# Altium PCB 5APOWER.PcbDoc
Units mil, origin at the board's own origin, x right, y up, seen from the top; angles counter-clockwise.
Board outline 3279.39 x 1075.3 mil, 2 copper layers (Top Layer, Bottom Layer); 46 components, 19 nets, 119 pads, 97 vias.
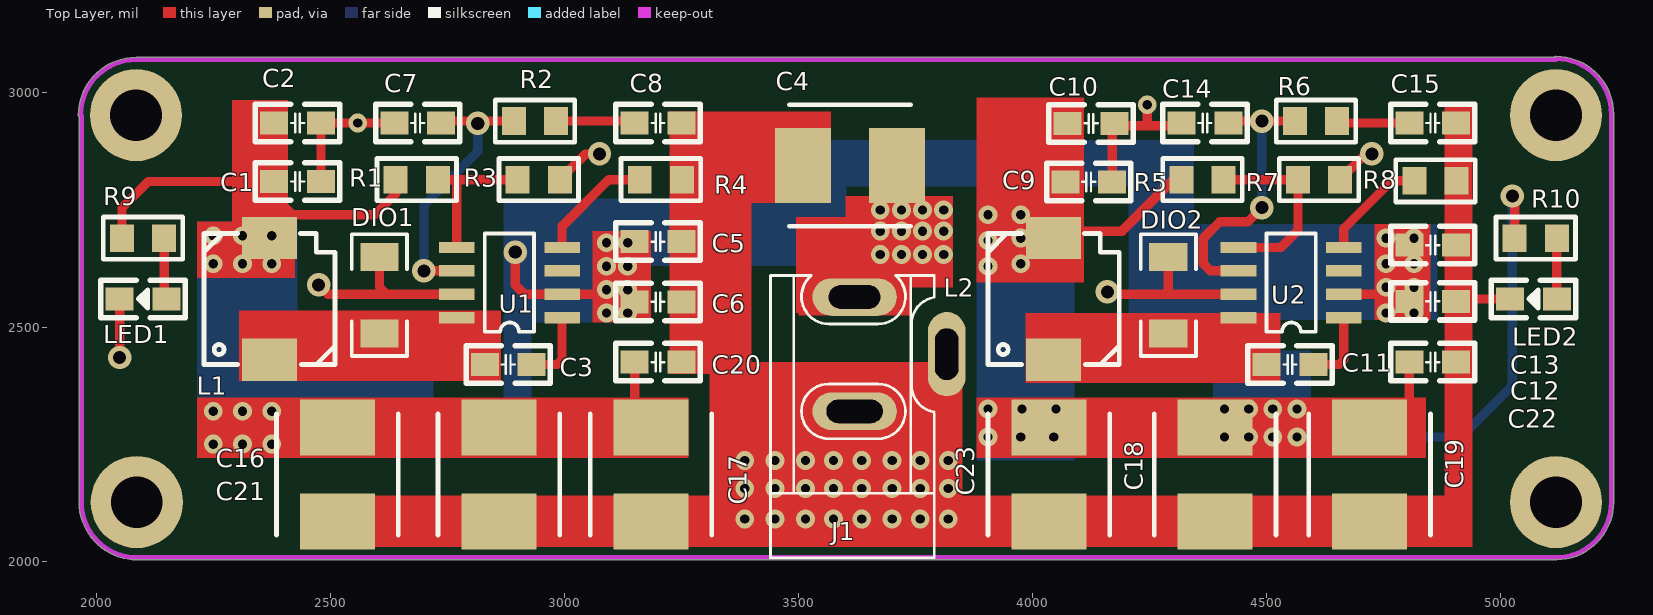
[diagram p0: Top Layer view]
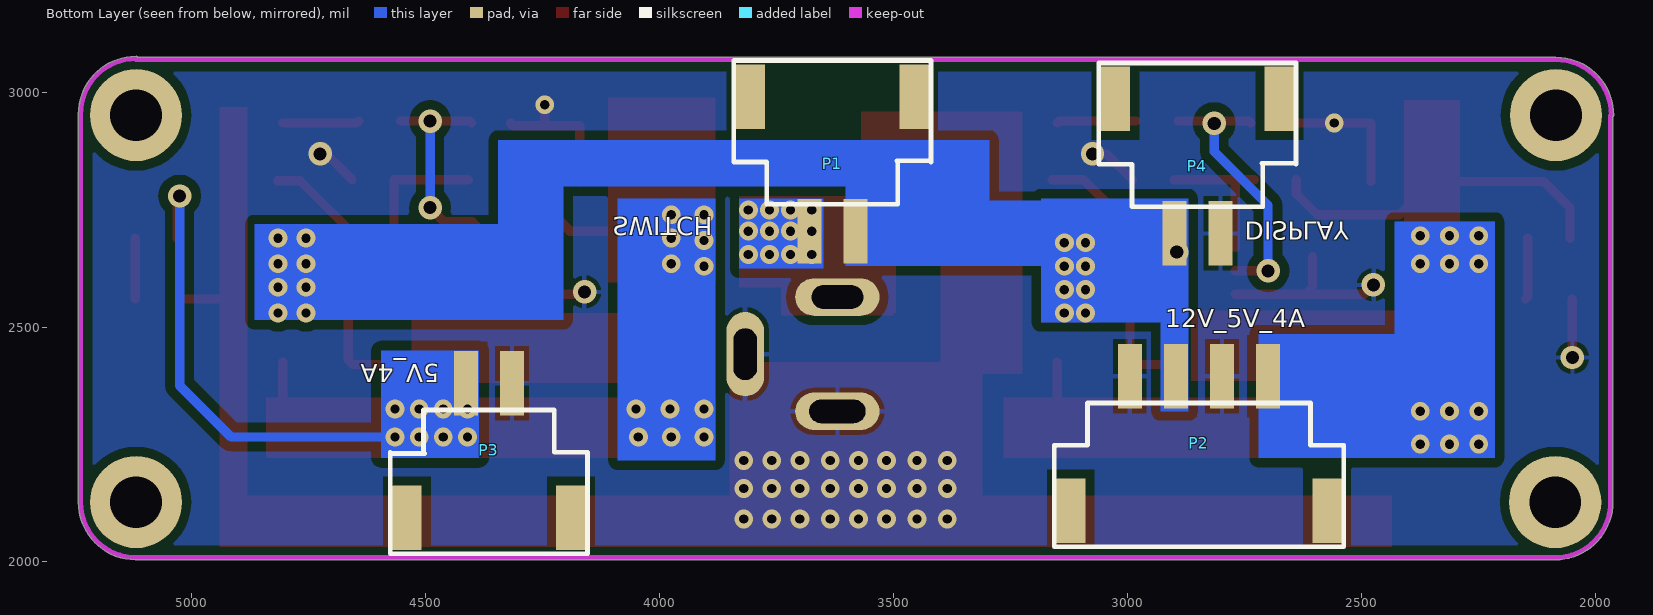
[diagram p1: Bottom Layer view, seen from below]

## Layer stack, top to bottom
Top Solder: solder mask 0.4, Solder Resist, Dk 3.5
Top Layer: signal copper 1.4
Dielectric 1: dielectric 12.6, FR-4, Dk 4.8
Bottom Layer: signal copper 1.4
Bottom Solder: solder mask 0.4, Solder Resist, Dk 3.5

## Board outline
1963.47,2125.98 cw(c1968.49,2125.98) 1963.49,2126.37 1963.49,2949.04 cw(c1966.87,2952.74) 1961.86,2952.74 cw(c2085,2952.74) 2085,3075.88 5113.92,3075.88 cw(c5118.11,3073.13) 5118.11,3078.14 cw(c5118.11,2955) 5241.25,2955 5241.25,2125.98 cw(c5118.11,2125.98) 5120.08,2002.86 cw(c5118.11,2125.98) 5118.11,2002.84 cw(c5118.11,2007.86) 5117.72,2002.86 2087,2002.86 cw(c2086.61,2007.86) 2086.61,2002.84 cw(c2086.61,2125.98)

## Design rules (kind name [scope] priority, off if disabled: settings)
Clearance [All] p1: gap=10
PolygonConnect [All] p1: connectstyle=Relief reliefconductorwidth=10 reliefentries=4 polygonreliefangle="90 Angle" airgapwidth=10
RoutingVias [All] p1: holewidth=28 width=50 viastyle="Through Hole" minholewidth=28 minwidth=50 maxholewidth=28 maxwidth=50
SolderMaskExpansion [All] p1: expansion=4
Width [All] p1: maxlimit=40 minlimit=10 preferedwidth=10
30 further rules are at their usual default settings.

## Components (designator, comment, footprint, x,y, rotation, side; value= is the part's Value field where it differs from the comment)
C1 "10uf" 0805C 2480,2811 r180 top
C2 "0.1uF" 0805C 2480,2936 r180 top
C3 "0.1uF" 0805C 2830,2420 r0 top
C4 "100uf" S-C6.6-H7.2 3740,2715 r180 top
C5 "4.7uF" 0805C 3250,2682.5 r180 top
C6 "4.7uF" 0805C 3250,2553.75 r180 top
C7 "47pF" 0805C 2636.67,2936 r0 top
C8 "4700pF" 0805C 3250,2936 r180 top
C9 "10uF" 0805C 4170,2810 r180 top
C10 "0.1uF" 0805C 4175,2935 r180 top
C11 "0.1uF" 0805C 4500,2420 r0 top
C12 "4.7uF" 0805C 4905,2555 r180 top
C13 "4.7uF" 0805C 4905,2675 r180 top
C14 "47pF" 0805C 4318.33,2936 r0 top
C15 "4700pF" 0805C 4905,2936 r180 top
C16 "220uF/16V" S-C6.6-H7.2 2645,2315 r270 top
C17 "220uF/16V" S-C6.6-H7.2 3315,2315 r270 top
C18 "220uF/16V" S-C6.6-H7.2 4520,2315 r270 top
C19 "220uF/16V" S-C6.6-H7.2 4850,2315 r270 top
C20 "10uF" 0805C 3250,2425 r180 top
C21 "220uF/16V" S-C6.6-H7.2 2990,2315 r270 top
C22 "10uF" 0805C 4905,2425 r180 top
C23 "220uF/16V" S-C6.6-H7.2 4165,2315 r270 top
DIO1 "SS54" SMB-B 2605,2650 r270 top
DIO2 "SS54" SMB-B 4290,2650 r270 top
J1 "PWR2.5" DC10B 3790,2145 r90 top
L1 "10uH/5A" L-7X7S 2370,2560 r0 top
L2 "10uH/5A" L-7X7S 4045,2560 r0 top
LED1 "RED_LED" 0805D 2100,2560 r180 top
LED2 "RED_LED" 0805D 5070,2560 r180 top
P1 "SWITCH" 2.54-2P 3680,2705 r180 bottom
P2 "12V_5V_4A" 2.54-4p 2700,2395 r0 bottom
P3 "5V_4A" 2.54-2P 4315,2380 r0 bottom
P4 "DISPLAY" 2.54-2P 2900,2700 r180 bottom
R1 "53.6K/%1" 0805_RES 2639.67,2815 r0 top
R2 "16.9K" 0805_RES 2892.33,2940 r0 top
R3 "10.2K/%1" 0805_RES 2900.33,2815 r0 top
R4 "243K" 0805_RES 3161,2815 r0 top
R5 "53.6K/%1" 0805_RES 4318,2815 r0 top
R6 "16.9K" 0805_RES 4560.67,2940 r0 top
R7 "10.2K/%1" 0805_RES 4567,2815 r0 top
R8 "243K" 0805_RES 4816,2812.25 r0 top
R9 "4.7K" 0805_RES 2055,2690 r0 top
R10 "4.7K" 0805_RES 5030,2690 r0 top
U1 "TPS54560DDA" SO08 2995,2520 r180 top
U2 "TPS54560DDA" SO08 4665,2520 r180 top

## Footprints (in the part's own frame and the unit in brackets; to place one, negate y for a bottom-side part, rotate by r counter-clockwise, add the part's x,y. Pads: shape width x height; smd on the part's side, far side on the other; paste and mask are expansions set on the pad)
2.54-2P [mm]
  rect 1.6x3.5 smd: 0(-3.2,7.3) 0(5.7,7.3)
  rect 1.3x3.5 smd: 1(0,0) 2(2.5,0)
  silkscreen extent -4.1,1.45 6.6,9.25
2.54-4p [mm]
  rect 1.6x3.5 smd: 0(-3.2,7.3) 0(10.7,7.3)
  rect 1.3x3.5 smd: 1(0,0) 2(2.5,0) 3(5,0) 4(7.5,0)
  silkscreen extent -4.1,1.45 11.6,9.25
0805_RES [mm]
  rect 1.3x1.5 smd: 1(0,0) 2(2.286,0)
  silkscreen extent -1.02,-1.14 3.3,1.14, body extent 0.14,-0.63 2.14,0.63, height 0.55
0805C [mil]
  rect 60x49.21 smd: 1(0,0) 2(100,0)
  silkscreen extent -40,-40 140,40
0805D [mil]
  rect 60x49.21 smd: A(-50,0) K(50,0)
  silkscreen extent -90,-40 90,40
DC10B [mil]
  oval 80x180 hole 50 slot 110 at 90 deg: 1(419.09,170)
  oval 80x180 hole 50 slot 120 at 90 deg: 2(175,170)
  oval 180x80 hole 50 slot 110 at 0 deg: 3(297.05,-26.85)
  silkscreen extent -138,0 465,350
L-7X7S [mil]
  rect 118.11x90 smd: 1(0,-130) 2(0,130)
  Top Layer pour cut-out: -140,140 -140,-140 140,-140 140,100 100,140
  silkscreen extent -140,-140 140,140
S-C6.6-H7.2 [mil]
  rect 119.69x159.84 smd: A(30,-130) K(230,-130)
  silkscreen extent 0,-260 260,0
SMB-B [mil]
  rect 60x82 smd: A(0,0) K(164,0)
  silkscreen extent -48,-59 212,59
SO08 [mil]
  rect 76x24 smd: 1(0,0) 2(0,-50) 3(0,-100) 4(0,-150) 5(225,-150) 6(225,-100) 7(225,-50) 8(225,0)
  silkscreen extent 60,-180 165,30

## Part data
C1 C2 C3 C5 C6 C7 C8 C9 C10 C11 C12 C13 C14 C15 C20 C22: library part CAP
C4: library part "Cap Pol1", "Polarized Capacitor (Radial)"
C16 C17 C18 C19 C21 C23: library part CAP-SOP, "铝电解电容"
DIO1 DIO2: library part IN5822
J1: "Low Voltage Power Supply Connector"
L1 L2: library part L
LED1 LED2: library part LED
P1 P3 P4: library part "Header 2", "Header, 2-Pin"
P2: library part "Header 4", "Header, 4-Pin"
R1 R3 R5 R7: library part RES, "精密电阻"
R2 R4 R6 R8 R9 R10: library part RES
U1 U2: "电源芯片"

## Free pads (board coordinates)
  round 196.85 hole 110.24: 1(2085,2952.76) 2(2086.61,2125.98) 3(5118.11,2125.98) 4(5118.11,2952.76)

## Via types
v1: diameter 40, hole 20, Top Layer to Bottom Layer, 86 vias
v2: diameter 50, hole 28, Top Layer to Bottom Layer, 11 vias

## Nets (pads, with @x,y where several pads share a name; then routed paths per layer and width w, separated by ;. In a path a pad name is that pad's centre, name@x,y a point inside that pad or via, vN(x,y) a via of type N, cw(c..) or ccw(c..) an arc to the next point about the centre after c; other vN are vias at no path point)
5V: C1.2 C2.2 C16.A C17.A C20.2 C21.A L1.2 P2.1 R1.1 R9.1 | length 923.8
  Top Layer w20: R9.1 2055,2755 2111,2811 C1.2 2380,2780 2420,2740 2595,2740 2639.67,2784.67 R1.1 ; C20.2 3150,2320 C17.A
  other v1: 2250,2250 2312.5,2250 2375,2250 2250,2320 2312.5,2320 2375,2320 2250,2635 2312.5,2635 2375,2635 2250,2695 2312.5,2695 2375,2695
5V_COMPUTER: C9.2 C10.2 C18.A C19.A C22.2 C23.A L2.2 P3.2 R5.1 R10.1 | length 1455.7
  Top Layer w20: L2.2 4060,2705 4191.33,2705 R5.1@4301.33,2815 ; 4805,2280 C22.2 ; v2(5025,2780) 5030,2775 R10.1
  Bottom Layer w20: v1(4565,2265) 4915,2265 5025,2375 v2(5025,2780)
  other v1: 3905,2265 3975,2265 4045,2265 4410,2265 4461.67,2265 4513.33,2265 3905,2325 3977.5,2325 4050,2325 4410,2325 4461.67,2325 4513.33,2325 4565,2325 3905,2630 3975,2635 3905,2685 3975,2690 3905,2740 3975,2740
12V: C5.2 C6.2 C12.2 C13.2 P1.2 P2.3 P4.1 U1.2 U2.2 | length 705
  Top Layer w20: v2(2895,2660) 2895,2590 2915,2570 U1.2 3133.75,2570 C6.2 C5.2 ; U2.2 4790,2570 4805,2585 C13.2
  other v1: 3090,2530 3135,2530 4755,2530 4815,2530 3090,2580 3135,2580 4755,2585 4815,2585 3090,2630 3135,2630 4755,2635 4815,2635 3090,2680 3135,2680 4755,2690 4815,2690
GND: C1.1 C2.1 C4.K C5.1 C6.1 C7.1 C8.1 C9.1 C10.1 C12.1 C13.1 C14.1 C15.1 C16.K C17.K C18.K C19.K C20.1 C21.K C22.1 C23.K DIO1.A DIO2.A J1.2 J1.3 LED1.K LED2.K P2.2 P2.4 P3.1 P4.2 R3.2 R4.2 R7.2 R8.2 U1.7 U2.7 | length 1793
  Top Layer w20: v2(2050,2435) LED1.K ; v2(2475,2590) 2495,2570 2620,2570 ; C1.1 C2.1 C7.1 ; DIO1.A 2605,2585 2620,2570 ; U1.7 2620,2570 ; R3.2 3045,2869.67 3074.67,2869.67 v2(3075,2870) ; v2(4160,2575) 4165,2570 4285,2570 ; C9.1 4170,2930 4241.17,2930 ; v1(4245,2975) 4245,2933.83 4241.17,2930 ; DIO2.A 4290,2575 4285,2570 ; C14.1 4312.33,2930 4241.17,2930 ; U2.7 4285,2570 ; R7.2 4712,2870 v2(4725,2870) ; C12.1 4910,2560 LED2.K
  other v1: 3385,2090 3450,2090 3515,2090 3575,2090 3635,2090 3700,2090 3760,2090 3820,2090 3385,2155 3450,2155 3515,2155 3575,2155 3635,2155 3700,2155 3760,2155 3820,2155 3385,2215 3450,2215 3515,2215 3575,2215 3635,2215 3700,2215 3760,2215 3820,2215 2558.33,2936
NetC3_1: C3.1 DIO1.K L1.1 U1.8 | length 145.4
  Top Layer w20: U1.8 2770,2445 2795,2420 C3.1
NetC3_2: C3.2 U1.1 | length 159.1
  Top Layer w20: C3.2 2985,2420 2995,2430 U1.1
NetC4_A: C4.A J1.1 P1.1
  other v1: 3675,2655 3720,2655 3765,2655 3810,2655 3675,2705 3720,2705 3765,2705 3810,2705 3675,2750 3720,2750 3765,2750 3810,2750
NetC7_2: C7.2 R2.1 U1.6 | length 590
  Top Layer w20: v2(2700,2620) U1.6 ; C7.2 2740.67,2940 R2.1
  Bottom Layer w20: v2(2700,2620) 2700,2760 2815,2875 v2(2815,2935)
NetC8_2: C8.2 R2.2 | length 169.3
  Top Layer w20: R2.2 3146,2940 C8.2
NetC11_1: C11.1 DIO2.K L2.1 U2.8
NetC11_2: C11.2 U2.1 | length 159.1
  Top Layer w20: C11.2 4655,2420 4665,2430 U2.1
NetC14_2: C14.2 R6.1 U2.6 | length 625.5
  Top Layer w20: C14.2@4401.67,2936 4405.67,2940 v2(4490,2940) R6.1@4552.33,2940 ; U2.6 4380,2620 4365,2635 4365,2690 4400,2725 4460,2725 v2(4490,2755)
  Bottom Layer w20: v2(4490,2755) v2(4490,2940)
NetC15_2: C15.2 R6.2 | length 164.3
  Top Layer w20: R6.2@4642.33,2940 4646.33,2936 C15.2
NetLED1_A: LED1.A R9.2 | length 132.1
  Top Layer w20: R9.2 2145,2565 LED1.A
NetLED2_A: LED2.A R10.2 | length 130
  Top Layer w20: LED2.A R10.2
NetR1_2: R1.2 R3.1 U1.5 | length 315.7
  Top Layer w20: R1.2 2770,2815 ; U1.5 2770,2815 ; R3.1 2770,2815
NetR4_1: R4.1 U1.4 | length 252.4
  Top Layer w20: U1.4 2995,2715 3095,2815 R4.1
NetR5_2: R5.2 R7.1 U2.5 | length 409.3
  Top Layer w20: R5.2 R7.1 4567,2707 4530,2670 U2.5
NetR8_1: R8.1 U2.4 | length 233.4
  Top Layer w20: U2.4 4665,2710 4767.25,2812.25 R8.1
pads on no net: P1.0 P2.0 P3.0 P4.0 U1.3 U2.3

## Polygon pours and split planes (outlines as drawn)
GND on Bottom Layer "Bottom Layer-No Net" (solid, remove dead copper, pour order 3): 1870,3245 1945,3170 5265,3170 5265,2040 5120,1895 5070,1945 1885,1945

## Keep-outs
Keep-Out Layer:
  lines w10: 1966.87,2952.74 cw(c2085,2952.74) 2085,3070.87 5118.11,3070.87 ; 1968.5,2952.74 1968.5,2125.98 ccw(c2086.61,2125.98) 2086.61,2007.86 5120,2007.87 ; 5118.11,2007.86 ccw(c5118.11,2125.98) 5236.24,2125.98 5236.24,2955 ccw(c5118.11,2955) 5118.11,3073.13

## Other copper
Top Layer:
  rectangle net NetC3_1: 2305,2385 2865,2535
  rectangle net 5V: 2290,2640 2410,2985
  rectangle net 5V: 2215,2220 3265,2350
  rectangle net GND: 3225,2400 3400,2960
  rectangle net GND: 2435,2030 4940,2140
  rectangle net GND: 3310,2030 3850,2425
  rectangle net 5V_COMPUTER: 3880,2595 4110,2990
  rectangle net 5V_COMPUTER: 3880,2220 4840,2350
  rectangle net NetC11_1: 3985,2380 4530,2530
  rectangle net GND: 4880,2030 4940,2970
  rectangle net 5V: 2215,2605 2425,2725
  rectangle net 12V: 3060,2510 3185,2705
  rectangle net 12V: 4730,2515 4850,2720
  rectangle net NetC4_A: 3655,2525 3740,2780
  rectangle net NetC4_A: 3500,2525 3730,2610
  rectangle net NetC4_A: 3600,2585 3830,2780
  rectangle net NetC4_A: 3495,2530 3695,2735
  rectangle net GND: 3335,2765 3570,2960
Bottom Layer:
  rectangle net 5V: 2215,2220 2430,2725
  rectangle net 5V_COMPUTER: 3880,2215 4090,2775
  rectangle net 5V_COMPUTER: 4385,2220 4595,2450
  rectangle net 5V: 2420,2220 2720,2485
  rectangle net 12V: 3035,2510 3185,2770
  rectangle net 12V: 3295,2630 3425,2900
  rectangle net 12V: 3295,2800 4345,2900
  rectangle net 12V: 4215,2515 4865,2720
  rectangle net 12V: 4205,2515 4345,2900
  rectangle net 12V: 3027.5,2630 3425,2770
  rectangle net 12V: 3385,2630 3602.5,2835
  rectangle net NetC4_A: 3650,2625 3830,2775
  rectangle net 12V: 2870,2320 2930,2775
  rectangle net 12V: 2870,2510 3185,2775
  pour cut-out: 3589.42,2789.42 3590,2788.84 3590,2630 3615,2630 3617.49,2632.49 3617.49,2788.9 3589.77,2788.9